# EAGLE board esquematico (EAGLE 7.6.0)
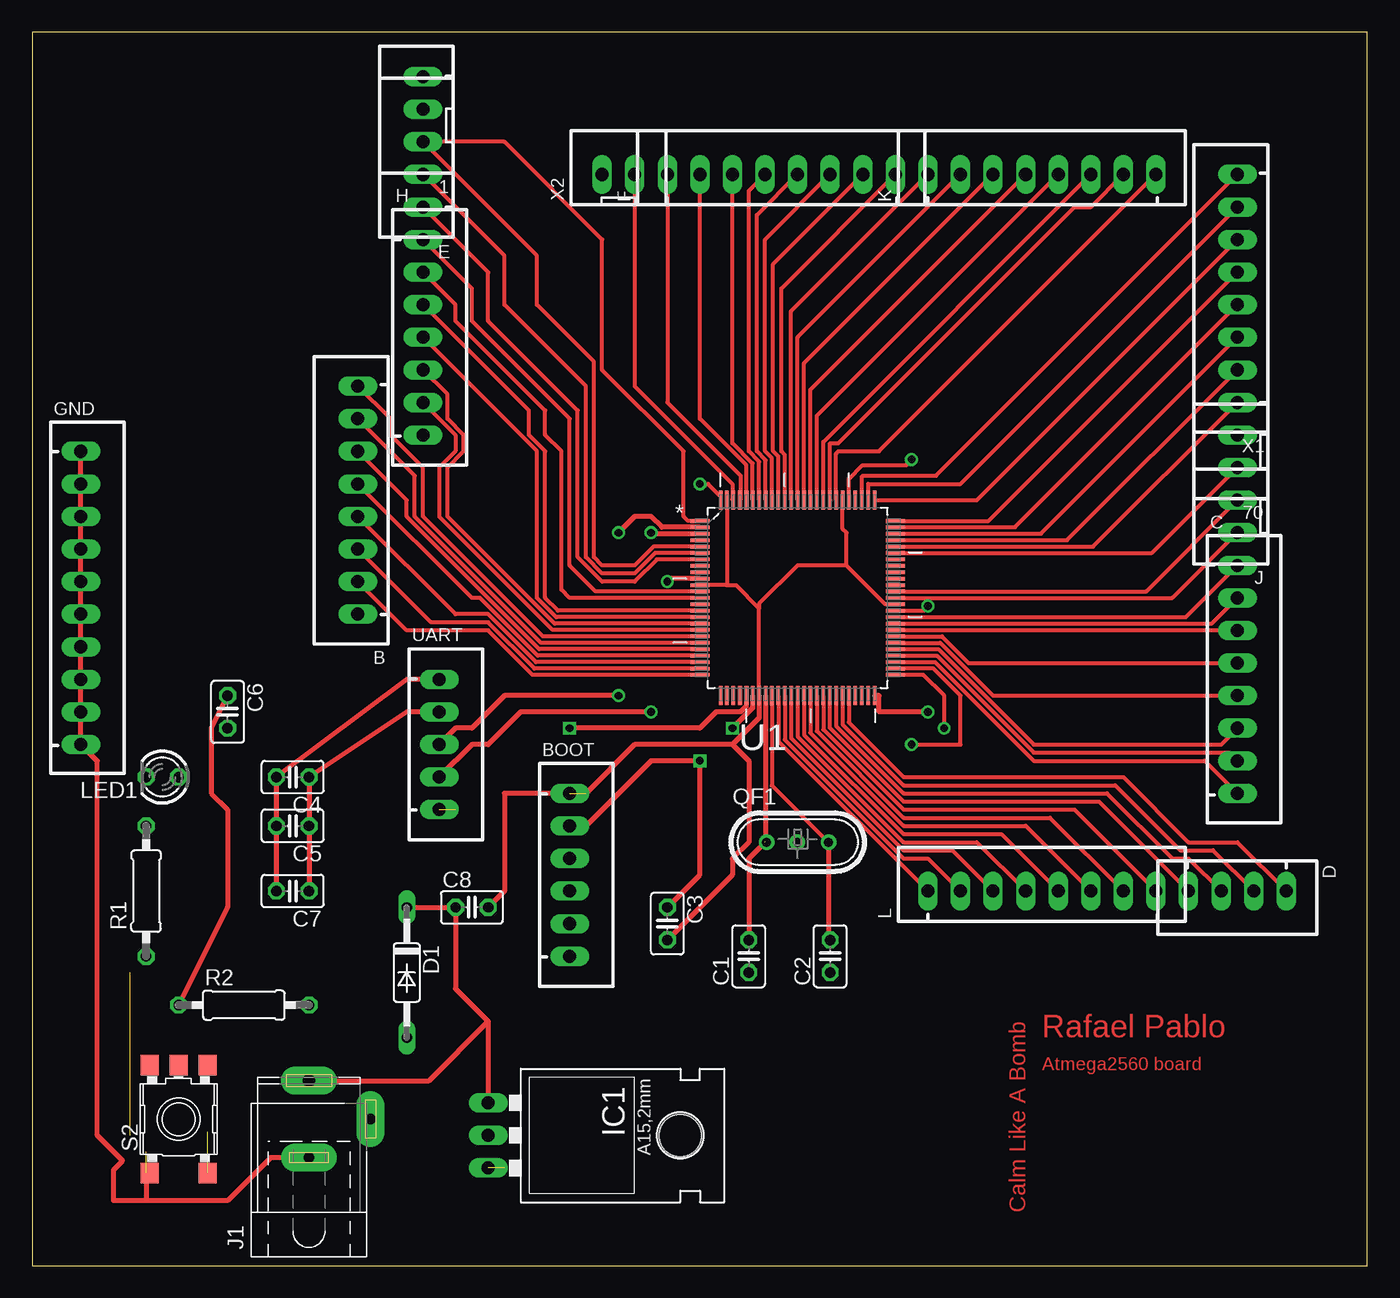
[diagram p0: board, top side]
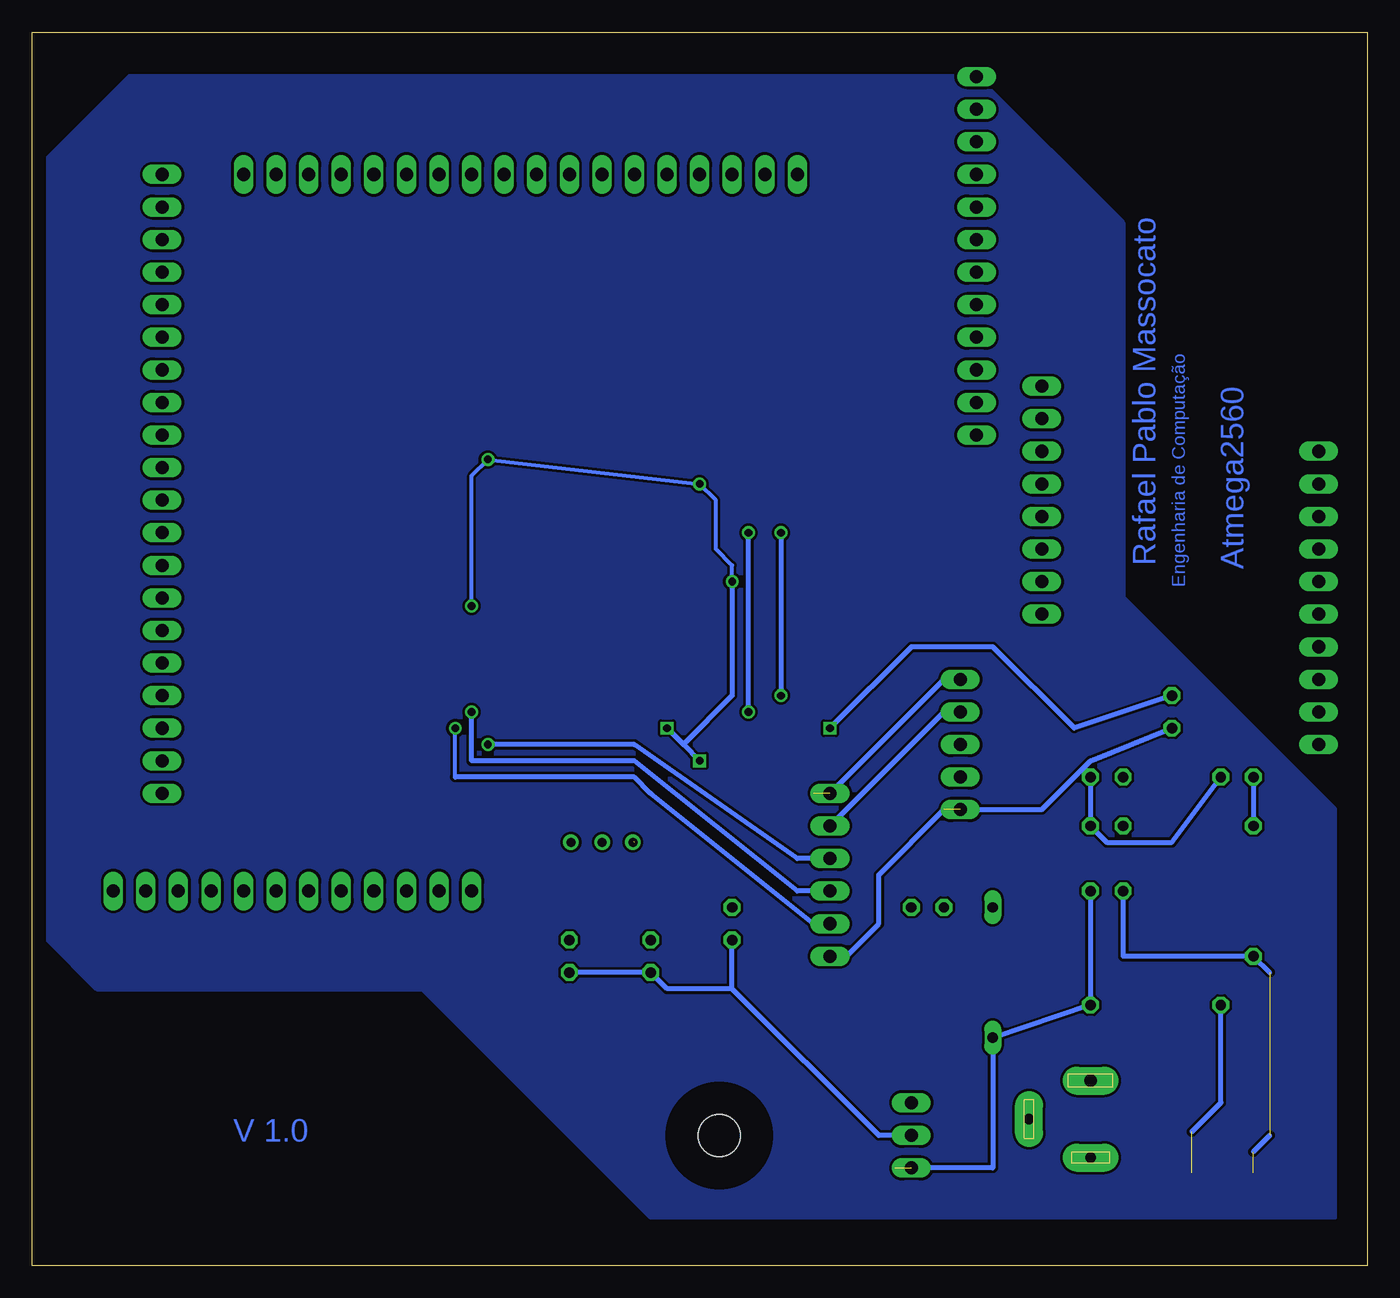
[diagram p1: board, bottom side, seen from below]

Size 104.12 x 96.19 mm. Coordinates in mm from the lower left corner, seen from the top.
Outline: 0,0 104.12,0 104.12,96.19 0,96.19 0,0
Copper layers (1*16): Top 0.035mm / dielectric 1.5mm / Bottom 0.035mm
Design rules "default": minimum track width 10mil, minimum drill 24mil, track to track 8mil, track to pad 8mil, pad to pad 8mil, via to via 8mil, smd to smd 8mil, copper to edge 40mil, drill to drill 8mil, minimum pad ring 10mil, minimum via ring 8mil, stop-mask expansion 4mil, vias tented up to drill 0mil, thermal gap 10mil

## Footprints (pad centres in the part's own frame; a part is rotated, then mirrored left to right if it is on the bottom)
JST-XH-02-PACKAGE-LONG-PAD = drill 1.016 long: 1 -1.27,0; 2 1.27,0
JST-XH-08-PACKAGE-LONG-PAD = drill 1.016 long: 1 -8.89,0; 2 -6.35,0; 3 -3.81,0; 4 -1.27,0; 5 1.27,0; 6 3.81,0; 7 6.35,0; 8 8.89,0
JST-XH-06-PACKAGE-LONG-PAD = drill 1.016 long: 1 -6.35,0; 2 -3.81,0; 3 -1.27,0; 4 1.27,0; 5 3.81,0; 6 6.35,0
C025-025X050 = drill 0.813 octagon: 1 -1.27,0; 2 1.27,0
JST-XH-04-PACKAGE-LONG-PAD = drill 1.016 long: 1 -3.81,0; 2 -1.27,0; 3 1.27,0; 4 3.81,0
DO35-10 = drill 0.813 long: A 5.08,0; C -5.08,0
JST-XH-05-PACKAGE-LONG-PAD = drill 1.016 long: 1 -5.08,0; 2 -2.54,0; 3 0,0; 4 2.54,0; 5 5.08,0
JST-XH-10-PACKAGE-LONG-PAD = drill 1.016 long: 1 -11.43,0; 2 -8.89,0; 3 -6.35,0; 4 -3.81,0; 5 -1.27,0; 6 1.27,0; 7 3.81,0; 8 6.35,0; 9 8.89,0; 10 11.43,0
JST-XH-07-PACKAGE-LONG-PAD = drill 1.016 long: 1 -7.62,0; 2 -5.08,0; 3 -2.54,0; 4 0,0; 5 2.54,0; 6 5.08,0; 7 7.62,0
78XXL = drill 1.016 long: GND 0,-3.81; IN -2.54,-3.81; OUT 2.54,-3.81 | hole 3.302: 0,11.176
SPC4078 = drill 0.8 pad 2.184 long: 1 -3,0; 2 0,-4.8 | drill 1 pad 2.184 long: 3 3,0
LED3MM = drill 0.813 octagon: A -1.27,0; K 1.27,0
HC49U = drill 0.7 pad 1.2: 1 -2.413,0; 2 -0.027,0; 3 2.413,0
0207/10 = drill 0.813 octagon: 1 -5.08,0; 2 5.08,0
SKHMPXE010 = smd 1.6 x 1.4: 1 -4.2,2.25; 2 4.2,2.25; 3 -4.2,-2.25; 4 4.2,-2.25; 5 4.2,0
QFP50P1600X1600X120-100N = smd 1.473 x 0.279: 1 -7.62,5.994; 2 -7.62,5.512; 3 -7.62,5.004; 4 -7.62,4.496; 5 -7.62,3.988; 6 -7.62,3.505; 7 -7.62,2.997; 8 -7.62,2.489; 9 -7.62,2.007; 10 -7.62,1.499; 11 -7.62,0.991; 12 -7.62,0.508; 13 -7.62,0; 14 -7.62,-0.508; 15 -7.62,-0.991; 16 -7.62,-1.499; 17 -7.62,-2.007; 18 -7.62,-2.489; 19 -7.62,-2.997; 20 -7.62,-3.505; 21 -7.62,-3.988; 22 -7.62,-4.496; 23 -7.62,-5.004; 24 -7.62,-5.512; 25 -7.62,-5.994; 51 7.62,-5.994; 52 7.62,-5.512; 53 7.62,-5.004; 54 7.62,-4.496; 55 7.62,-3.988; 56 7.62,-3.505; 57 7.62,-2.997; 58 7.62,-2.489; 59 7.62,-2.007; 60 7.62,-1.499; 61 7.62,-0.991; 62 7.62,-0.508; 63 7.62,0; 64 7.62,0.508; 65 7.62,0.991; 66 7.62,1.499; 67 7.62,2.007; 68 7.62,2.489; 69 7.62,2.997; 70 7.62,3.505; 71 7.62,3.988; 72 7.62,4.496; 73 7.62,5.004; 74 7.62,5.512; 75 7.62,5.994 | smd 0.279 x 1.473: 26 -5.994,-7.62; 27 -5.512,-7.62; 28 -5.004,-7.62; 29 -4.496,-7.62; 30 -3.988,-7.62; 31 -3.505,-7.62; 32 -2.997,-7.62; 33 -2.489,-7.62; 34 -2.007,-7.62; 35 -1.499,-7.62; 36 -0.991,-7.62; 37 -0.508,-7.62; 38 0,-7.62; 39 0.508,-7.62; 40 0.991,-7.62; 41 1.499,-7.62; 42 2.007,-7.62; 43 2.489,-7.62; 44 2.997,-7.62; 45 3.505,-7.62; 46 3.988,-7.62; 47 4.496,-7.62; 48 5.004,-7.62; 49 5.512,-7.62; 50 5.994,-7.62; 76 5.994,7.62; 77 5.512,7.62; 78 5.004,7.62; 79 4.496,7.62; 80 3.988,7.62; 81 3.505,7.62; 82 2.997,7.62; 83 2.489,7.62; 84 2.007,7.62; 85 1.499,7.62; 86 0.991,7.62; 87 0.508,7.62; 88 0,7.62; 89 -0.508,7.62; 90 -0.991,7.62; 91 -1.499,7.62; 92 -2.007,7.62; 93 -2.489,7.62; 94 -2.997,7.62; 95 -3.505,7.62; 96 -3.988,7.62; 97 -4.496,7.62; 98 -5.004,7.62; 99 -5.512,7.62; 100 -5.994,7.62

## Placement (x,y rotation side)
1  [JST-XH-02-PACKAGE-LONG-PAD]  30.48,88.9 90 top
70  [JST-XH-02-PACKAGE-LONG-PAD]  93.98,63.5 90 top
B  [JST-XH-08-PACKAGE-LONG-PAD]  25.4,59.69 90 top
BOOT  Bootloader  [JST-XH-06-PACKAGE-LONG-PAD]  41.91,30.48 270 top
C  Digital  [JST-XH-08-PACKAGE-LONG-PAD]  93.98,45.72 270 top
C1  22 pF  [C025-025X050]  55.88,24.13 90 top
C2  22 pF  [C025-025X050]  62.23,24.13 90 top
C3  0.1uF  [C025-025X050]  49.53,26.67 270 top
C4  0.1uF  [C025-025X050]  20.32,38.1 180 top
C5  0.1uF  [C025-025X050]  20.32,34.29 180 top
C6  0.1uF  [C025-025X050]  15.24,43.18 270 top
C7  0.1uF  [C025-025X050]  20.32,29.21 180 top
C8  0.33uF  [C025-025X050]  34.29,27.94 0 top
D  Digital  [JST-XH-04-PACKAGE-LONG-PAD]  93.98,29.21 180 top
D1  Protect  [DO35-10]  29.21,22.86 270 top
E  PWMs  [JST-XH-05-PACKAGE-LONG-PAD]  30.48,87.63 90 top
F  Analog  [JST-XH-08-PACKAGE-LONG-PAD]  58.42,85.09 0 top
GND  Undergrounds  [JST-XH-10-PACKAGE-LONG-PAD]  3.81,52.07 270 top
H  PWMs  [JST-XH-07-PACKAGE-LONG-PAD]  30.48,72.39 270 top
IC1  [78XXL]  39.37,10.16 270 top
J  [JST-XH-02-PACKAGE-LONG-PAD]  93.98,58.42 90 top
J1  [SPC4078]  21.59,11.43 90 top
K  Analog  [JST-XH-08-PACKAGE-LONG-PAD]  78.74,85.09 0 top
L  [JST-XH-08-PACKAGE-LONG-PAD]  78.74,29.21 0 top
LED1  [LED3MM]  10.16,38.1 180 top
QF1  16Mhz  [HC49U]  59.69,33.02 0 top
R1  470ohms  [0207/10]  8.89,29.21 90 top
R2  1Kohms  [0207/10]  16.51,20.32 0 top
S2  Reset  [SKHMPXE010]  11.43,11.43 90 top
U1  ATMEGA2560  [QFP50P1600X1600X120-100N]  59.69,52.07 0 top
UART  UART  [JST-XH-05-PACKAGE-LONG-PAD]  31.75,40.64 270 top
X1  [JST-XH-08-PACKAGE-LONG-PAD]  93.98,76.2 90 top
X2  JST-XH-02-PIN-LONG-PAD  [JST-XH-02-PACKAGE-LONG-PAD]  45.72,85.09 0 top

## Library data of the parts
1 70 B BOOT C D E F GND H J K L UART X1 X2 = Rembrandt Electronics - JST XH Connectors v1-0
C1-C8 = rcl
D1 = diode
IC1 = tango
J1 = con-jack; OC_FARNELL: unknown; OC_NEWARK: unknown
LED1 = led
QF1 = crystal; MF: 16 MHZ; OC_FARNELL: unknown; OC_NEWARK: unknown
R1 R2 = eagle-ltspice; SPICEMODEL: NONE; SPICEPREFIX: R
S2 = switch
U1 = Atmel_By_element14_Batch_1-00; DESCRIPTION: Microcontroller; MPN: ATMEGA2560-16AU; OC_FARNELL: 1288330; OC_NEWARK: 23M5051; PACKAGE: LQFP-100; SUPPLIER: ATMEL

## Nets
CRISTAL: C2.2 QF1.3 U1.34
GND: BOOT.1 C1.1 C2.1 C3.2 C4.2 C5.2 C7.2 C8.2 GND.1 GND.2 GND.3 GND.4 GND.5 GND.6 GND.7 GND.8 GND.9 GND.10 IC1.GND J1.1 R1.1 S2.1 U1.11 U1.32 U1.62 U1.81 U1.99 UART.1
N$1: C8.1 D1.C IC1.IN J1.3
N$2: C1.2 QF1.1 U1.33
N$3: U1.98 X2.2
N$4: LED1.K R1.2
N$5: C.8 U1.53
N$6: U1.2 UART.3
N$7: C6.1 R2.1 S2.3 U1.30
N$8: C.7 U1.54
N$9: C.6 U1.55
N$10: C.5 U1.56
N$11: C.4 U1.57
N$12: C.3 U1.58
N$13: C.2 U1.59
N$14: C.1 U1.60
N$15: B.8 U1.19
N$16: B.7 U1.20
N$17: B.6 U1.21
N$18: B.5 U1.22
N$19: B.4 U1.23
N$20: B.3 U1.24
N$21: B.2 U1.25
N$22: U1.26
N$23: U1.78 X1.8
N$24: U1.77 X1.7
N$25: U1.76 X1.6
N$26: U1.75 X1.5
N$27: U1.74 X1.4
N$28: U1.73 X1.3
N$29: U1.72 X1.2
N$30: U1.71 X1.1
N$31: F.1 U1.97
N$32: F.2 U1.96
N$33: F.3 U1.95
N$34: F.4 U1.94
N$35: F.5 U1.93
N$36: F.6 U1.92
N$37: F.7 U1.91
N$38: F.8 U1.90
N$39: K.1 U1.89
N$40: K.2 U1.88
N$41: K.3 U1.87
N$42: K.4 U1.86
N$43: H.1 U1.12
N$44: H.2 U1.13
N$45: H.3 U1.15
N$46: H.4 U1.16
N$47: H.5 U1.17
N$48: H.6 U1.18
N$50: J.1 U1.63
N$51: J.2 U1.64
N$52: K.5 U1.85
N$53: K.6 U1.84
N$54: K.7 U1.83
N$55: K.8 U1.82
N$56: L.1 U1.35
N$57: L.2 U1.36
N$58: L.3 U1.37
N$59: L.4 U1.38
N$60: L.5 U1.39
N$61: L.6 U1.40
N$62: L.7 U1.41
N$63: L.8 U1.42
N$64: D.4 U1.43
N$65: D.3 U1.44
N$66: D.2 U1.45
N$67: D.1 U1.46
N$68: BOOT.4 U1.50
N$70: U1.3 UART.4
N$71: E.3 U1.5
N$72: E.2 U1.6
N$73: E.1 U1.7
N$74: BOOT.5 U1.51
N$75: BOOT.3 U1.52
N$76: 70.1 U1.70
N$78: BOOT.6 C6.2 UART.5
N$80: 1.1 U1.1
VCC: BOOT.2 C3.1 C4.1 C5.1 C7.1 D1.A IC1.OUT LED1.A R2.2 U1.10 U1.31 U1.61 U1.80 U1.100 UART.2

## Tracks (layer width: path | path; a pad name or v marks a point on that pad's centre or on a via)
CRISTAL
  Top 0.305: U1.34 57.68,37.44 QF1.3
  Top 0.406: C2.2 62.1,25.53 QF1.3 62.23,33.02
GND  (3 unrouted)
  Top 0.305: U1.62 66.55,51.56 63.5,54.61 | 63.5,54.61 63.5,57.15 63.2,57.45 U1.81 | U1.32 56.69,51.26 | 56.69,51.26 54.89,53.06 54.18,53.06 | 54.18,53.06 U1.11 | U1.99 54.18,53.06 | 63.5,54.61 59.69,54.61 56.69,51.61 56.69,51.26
  Top 0.406: UART.1 29.21,45.72 C4.2 C5.2 C7.2 | BOOT.1 36.83,36.83 36.83,29.21 C8.2 | U1.32 56.69,42.72 54.61,40.64 | 54.61,40.64 46.99,40.64 43.18,36.83 | C3.2 54.61,30.48 54.61,31.75 55.88,33.02 55.88,39.37 54.61,40.64 | GND.1 GND.2 GND.3 GND.4 GND.5 GND.6 GND.7 GND.8 GND.9 GND.10 5.08,39.37 5.08,10.16 7.06,8.18 6.35,7.47 6.35,5.08 8.89,5.08 | J1.1 18.59,8.43 15.24,5.08 8.89,5.08 | S2.1 8.89,7.23 8.89,5.08
  Bottom 0.406: UART.1 33.02,45.72 BOOT.1 | C7.2 19.05,24.13 R1.1 7.62,22.86 | 7.62,10.16 8.89,8.89 | IC1.GND 38.1,10.16 49.53,21.59 | 49.53,21.59 54.61,21.59 C1.1 C2.1 | 49.53,21.59 C3.2
N$1
  Top 0.406: D1.C C8.1 33.02,21.59 35.56,19.05 | 35.56,19.05 IC1.IN | J1.3 30.94,14.43 35.56,19.05
N$2  (1 unrouted)
  Top 0.406: U1.33 57.2,33.1 | C1.2 55.88,31.75 57.15,33.02 QF1.1
N$3
  Top 0.305: X2.2 46.99,68.58 54.61,60.96 54.61,59.77 U1.98
N$4
  Bottom 0.406: LED1.K R1.2
N$5
  Top 0.305: U1.53 70.41,47.07 78.11,39.37 91.44,39.37 C.8
N$6  (via drill 0.6)
  Top 0.406: U1.2 49.1,57.58 48.26,58.42 46.99,58.42 v45.72,57.15 | v45.72,44.45 36.83,44.45 34.29,41.91 33.02,41.91 UART.3
  Bottom 0.406: v45.72,57.15 v45.72,44.45
N$7  (via drill 0.6)  (1 unrouted)
  Top 0.305: U1.30 55.7,43.64
  Top 0.406: C6.1 13.97,41.91 13.97,36.83 15.24,35.56 15.24,27.94 R2.1 | 55.7,43.64 55.25,43.18 53.34,43.18 52.07,41.91 v41.91,41.91
  Bottom 0.406: C6.1 22.86,41.91 29.21,48.26 35.56,48.26 v41.91,41.91 | 13.68,10.45 11.43,12.7 R2.1
N$8
  Top 0.305: U1.54 70.54,47.57 78.11,40.01 93.34,40.01 C.7
N$9
  Top 0.305: U1.55 70.66,48.08 78.11,40.64 92.71,40.64 C.6
N$10
  Top 0.305: U1.56 70.81,48.56 74.93,44.45 C.5
N$11
  Top 0.305: U1.57 70.94,49.07 73.03,46.99 C.4
N$12
  Top 0.305: U1.58 93.93,49.58 C.3
N$13
  Top 0.305: U1.59 91.97,50.06 C.2
N$14
  Top 0.305: U1.60 89.94,50.57 C.1
N$15
  Top 0.305: U1.19 39.83,49.07 30.48,58.42 30.48,62.23 27.94,64.77 27.94,66.04 B.8
N$16
  Top 0.305: U1.20 39.7,48.56 29.84,58.42 29.84,61.59 B.7
N$17
  Top 0.305: U1.21 39.55,48.08 29.21,58.42 29.21,59.69 B.6
N$18
  Top 0.305: U1.22 39.42,47.57 34.92,52.07 34.29,52.07 B.5
N$19
  Top 0.305: U1.23 39.29,47.07 35.56,50.8 33.02,50.8 B.4
N$20
  Top 0.305: U1.24 39.17,46.56 35.56,50.16 31.11,50.16 B.3
N$21
  Top 0.305: U1.25 39.01,46.08 35.56,49.53 29.21,49.53 B.2
N$23
  Top 0.305: U1.78 64.69,61.52 64.77,61.59 70.48,61.59 X1.8
N$24
  Top 0.305: U1.77 65.2,60.96 72.39,60.96 X1.7
N$25
  Top 0.305: U1.76 73.66,59.69 X1.6
N$26
  Top 0.305: U1.75 74.57,58.06 X1.5
N$27
  Top 0.305: U1.74 76.63,57.58 X1.4
N$28
  Top 0.305: U1.73 78.66,57.07 X1.3
N$29
  Top 0.305: U1.72 80.7,56.57 X1.2
N$30
  Top 0.305: U1.71 82.73,56.06 X1.1
N$31
  Top 0.305: F.1 49.53,67.31 55.25,61.59 55.25,59.74 U1.97
N$32
  Top 0.305: U1.96 55.7,62.41 52.07,66.04 F.2
N$33
  Top 0.305: U1.95 56.19,62.56 54.61,64.14 F.3
N$34
  Top 0.305: U1.94 56.69,62.69 55.88,63.5 55.88,83.82 F.4
N$35
  Top 0.305: U1.93 57.2,62.81 56.52,63.5 56.52,81.92 F.5
N$36
  Top 0.305: U1.92 57.68,62.97 57.15,63.5 57.15,80.01 F.6
N$37
  Top 0.305: U1.91 58.19,63.09 57.78,63.5 57.78,78.11 F.7
N$38
  Top 0.305: U1.90 58.7,63.22 58.42,63.5 58.42,76.2 F.8
N$39
  Top 0.305: U1.89 59.18,74.42 K.1
N$40
  Top 0.305: U1.88 59.69,72.39 K.2
N$41
  Top 0.305: U1.87 60.2,70.36 K.3
N$42
  Top 0.305: U1.86 60.68,68.3 K.4
N$43
  Top 0.305: U1.12 43.94,52.58 41.91,54.61 41.91,66.04 34.29,73.66 34.29,76.2 H.1
N$44
  Top 0.305: U1.13 41.91,52.07 41.28,52.7 41.28,63.5 40,64.77 40,66.67 33.02,73.66 33.02,74.93 H.2
N$45
  Top 0.305: U1.15 41,51.08 40,52.07 40,63.5 38.73,64.77 38.73,66.67 H.3
N$46
  Top 0.305: U1.16 40.87,50.57 39.37,52.07 39.37,63.5 H.4
N$47
  Top 0.305: U1.17 40.74,50.06 32.39,58.42 32.39,62.23 33.66,63.5 33.66,64.77 32.39,66.04 32.39,67.94 H.5
N$48
  Top 0.305: U1.18 40.59,49.58 31.75,58.42 31.75,62.23 33.02,63.5 33.02,64.77 H.6
N$50
  Top 0.305: U1.63 88.9,52.07 J.1
N$51
  Top 0.305: U1.64 86.87,52.58 J.2
N$52
  Top 0.305: U1.85 61.19,66.27 K.5
N$53
  Top 0.305: U1.84 61.7,64.24 K.6
N$54
  Top 0.305: U1.83 62.23,59.69 62.23,64.14 62.87,64.14 81.28,82.55 82.55,82.55 K.7
N$55
  Top 0.305: U1.82 62.69,63.32 62.87,63.5 66.04,63.5 K.8
N$56
  Top 0.305: U1.35 58.19,40.87 L.1
N$57
  Top 0.305: U1.36 58.7,41 67.95,31.75 69.85,31.75 L.2
N$58
  Top 0.305: U1.37 59.18,41.15 67.95,32.38 71.75,32.38 L.3
N$59
  Top 0.305: U1.38 59.69,41.27 67.95,33.02 73.66,33.02 L.4
N$60
  Top 0.305: U1.39 60.2,41.4 67.95,33.66 75.56,33.66 L.5
N$61
  Top 0.305: U1.40 60.68,41.55 67.95,34.29 77.47,34.29 L.6
N$62
  Top 0.305: U1.41 61.19,41.68 67.95,34.92 79.38,34.92 L.7
N$63
  Top 0.305: U1.42 61.7,41.81 67.95,35.56 81.28,35.56 L.8
N$64
  Top 0.305: U1.43 62.18,41.96 67.95,36.2 83.19,36.2 D.4
N$65
  Top 0.305: U1.44 62.69,42.09 67.95,36.83 83.82,36.83 88.9,31.75 90.17,31.75 D.3
N$66
  Top 0.305: U1.45 63.2,42.22 67.95,37.47 84.45,37.47 89.53,32.38 92.08,32.38 D.2
N$67
  Top 0.305: U1.46 63.68,42.37 67.95,38.1 85.09,38.1 90.17,33.02 93.98,33.02 D.1
N$68  (via drill 0.6)
  Top 0.406: v69.85,43.18 66.04,43.18 66.04,44.45 U1.50
  Bottom 0.406: BOOT.4 44.45,29.21 57.15,39.37 69.85,39.37 v69.85,43.18
N$69
  pour Bottom: 2.54,3.81 2.54,35.56 19.05,52.07 19.05,81.28 30.48,92.71 96.52,92.71 102.87,86.36 102.87,25.4 99.06,21.59 73.66,21.59 55.88,3.81
N$70  (via drill 0.6)
  Top 0.406: v48.26,57.15 48.34,57.07 U1.3 | v48.26,43.18 38.1,43.18 35.56,40.64 34.29,40.64 UART.4
  Bottom 0.406: v48.26,43.18 v48.26,57.15
N$71
  Top 0.305: U1.5 48.44,56.06 46.99,54.61 44.45,54.61 43.81,55.24 43.81,70.48 39.37,74.93 39.37,78.74 E.3
N$72
  Top 0.305: U1.6 48.59,55.58 46.99,53.98 44.45,53.98 43.18,55.24 43.18,68.58 36.83,74.93 36.83,78.74 E.2
N$73
  Top 0.305: U1.7 48.72,55.07 46.99,53.34 44.45,53.34 42.55,55.24 42.55,66.67 35.56,73.66 35.56,77.47 E.1
N$74  (via drill 0.6)
  Top 0.305: v71.12,41.91 71.12,44.45 69.49,46.08 U1.51
  Bottom 0.305: 71.12,38.1 v71.12,41.91
  Bottom 0.406: BOOT.5 43.18,26.67 55.88,36.83 57.15,38.1 71.12,38.1
N$75  (via drill 0.6)
  Top 0.305: v68.58,40.64 72.39,40.64 72.39,44.45 70.28,46.56 U1.52
  Bottom 0.406: BOOT.3 44.45,31.75 57.15,40.64 v68.58,40.64
N$76
  Top 0.305: U1.70 87.33,55.58 70.1
N$78  (1 unrouted)
  Bottom 0.406: BOOT.6 40.64,24.13 38.1,26.67 38.1,30.48 33.02,35.56 | UART.5 25.4,35.56 21.59,39.37 C6.2
N$80
  Top 0.305: U1.1 51.16,58.06 50.8,58.42 50.8,63.5 44.45,69.85 44.45,80.01 36.83,87.63 1.1
VCC  (via drill 0.6)  (1 unrouted)
  Top 0.305: v52.07,60.96 52.7,60.96 53.7,59.97 U1.100 | U1.80 63.68,61.35 64.75,62.42 68.14,62.42 v68.58,62.87 | U1.61 69.57,51.08 v69.85,51.44
  Top 0.406: UART.2 29.21,43.18 C4.1 C5.1 C7.1 | U1.31 56.19,43.48 v54.61,41.91 | BOOT.2 43.18,34.29 48.26,39.37 v52.07,39.37 52.07,30.48 C3.1 | U1.10 49.76,53.57 v49.53,53.34
  Bottom 0.305: v49.53,53.34 49.53,54.61 50.8,55.88 50.8,59.69 v52.07,60.96 v68.58,62.87 69.85,61.59 v69.85,51.44
  Bottom 0.406: UART.2 33.02,43.18 BOOT.2 | C4.1 C5.1 20.32,33.02 15.24,33.02 LED1.A | C7.1 R2.2 D1.A 29.21,7.62 36.83,7.62 | v54.61,41.91 53.34,40.64 | 53.34,40.64 v52.07,39.37 | v49.53,53.34 49.53,44.45 53.34,40.64

## Text on the board
Top: Calm Like A Bomb | Rafael Pablo | Atmega2560 board
Bottom: Engenharia de Computação | Atmega2560 | Rafael Pablo Massocato | V 1.0